# Altium PCB Load Cell ADC Module.PcbDoc
Units mm, origin at the board's own origin, x right, y up, seen from the top; angles counter-clockwise.
Board outline 30 x 27.5 mm, 4 copper layers (L1 - Primary, L2 - GND, L3 - GND, L4 - Secondary), stack 1.57 mm thick; 19 components, 15 nets, 60 pads, 33 vias.
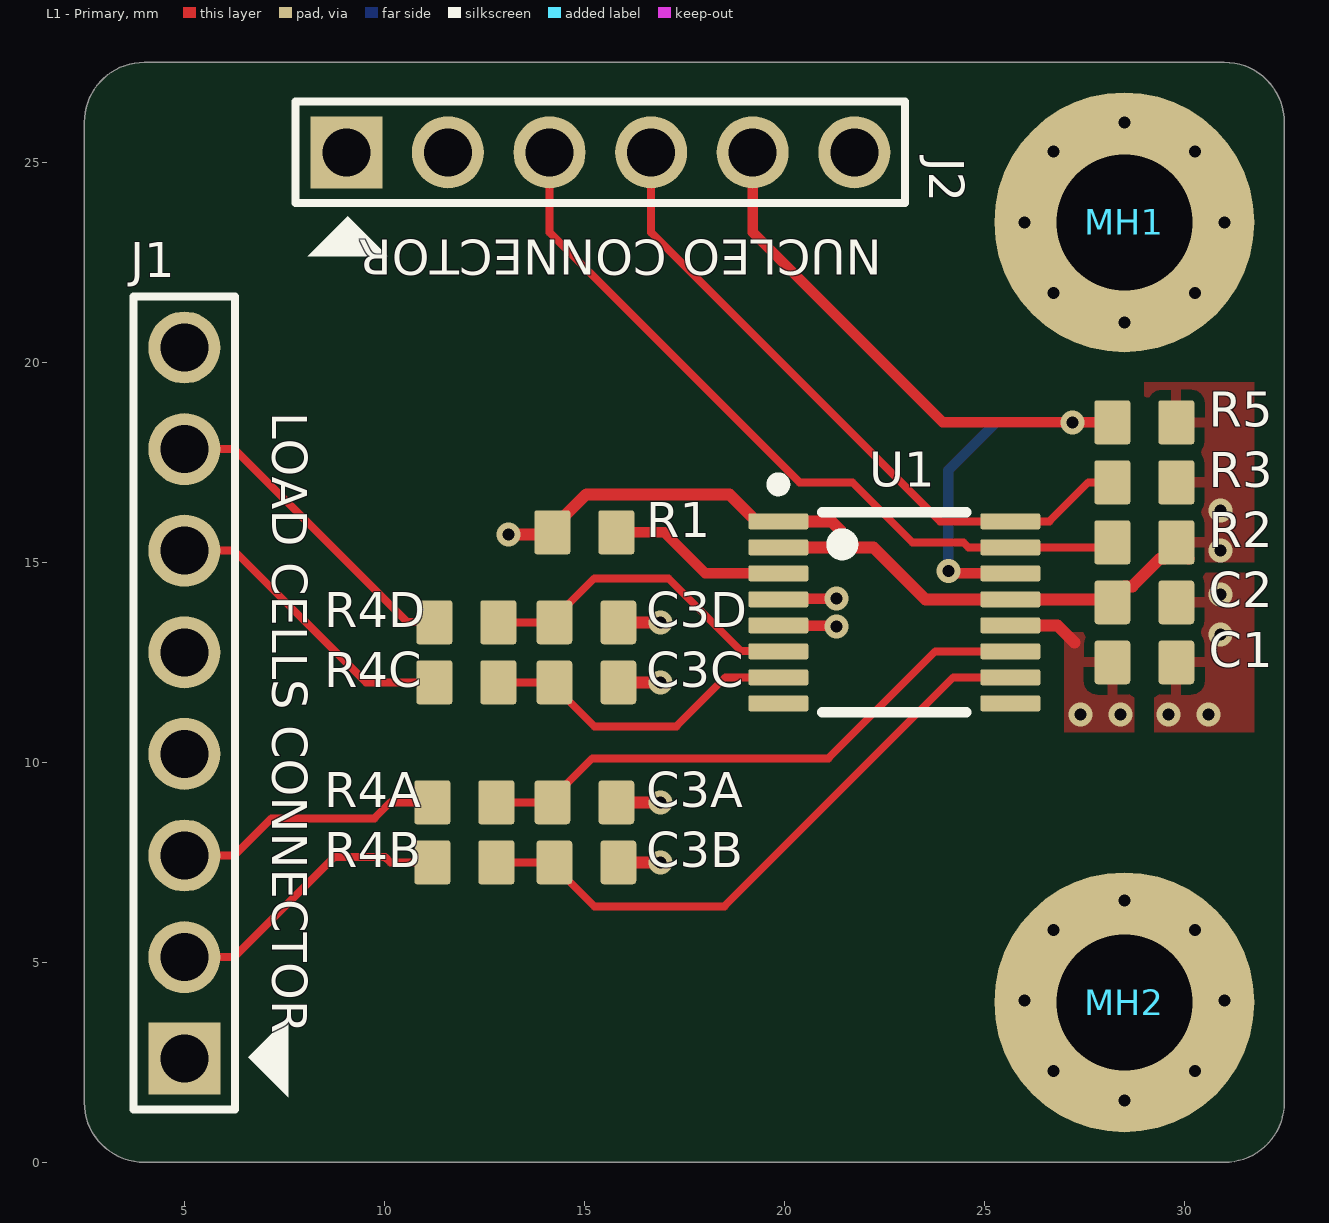
[diagram p0: L1 - Primary view]
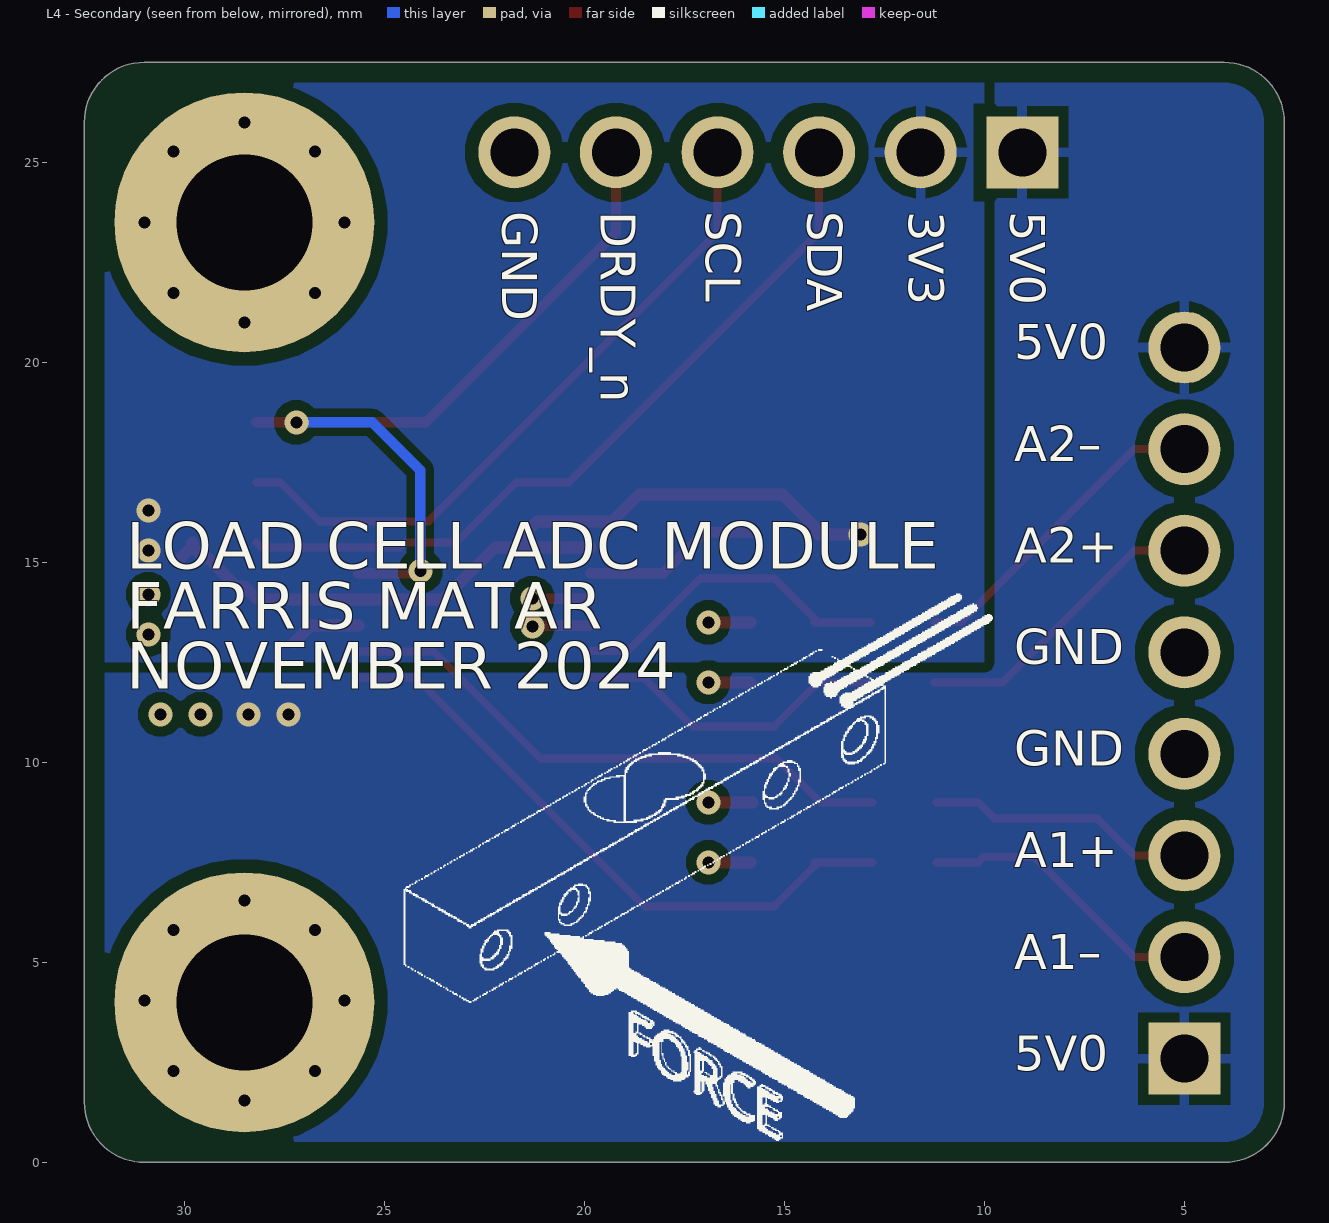
[diagram p1: L4 - Secondary view, seen from below]
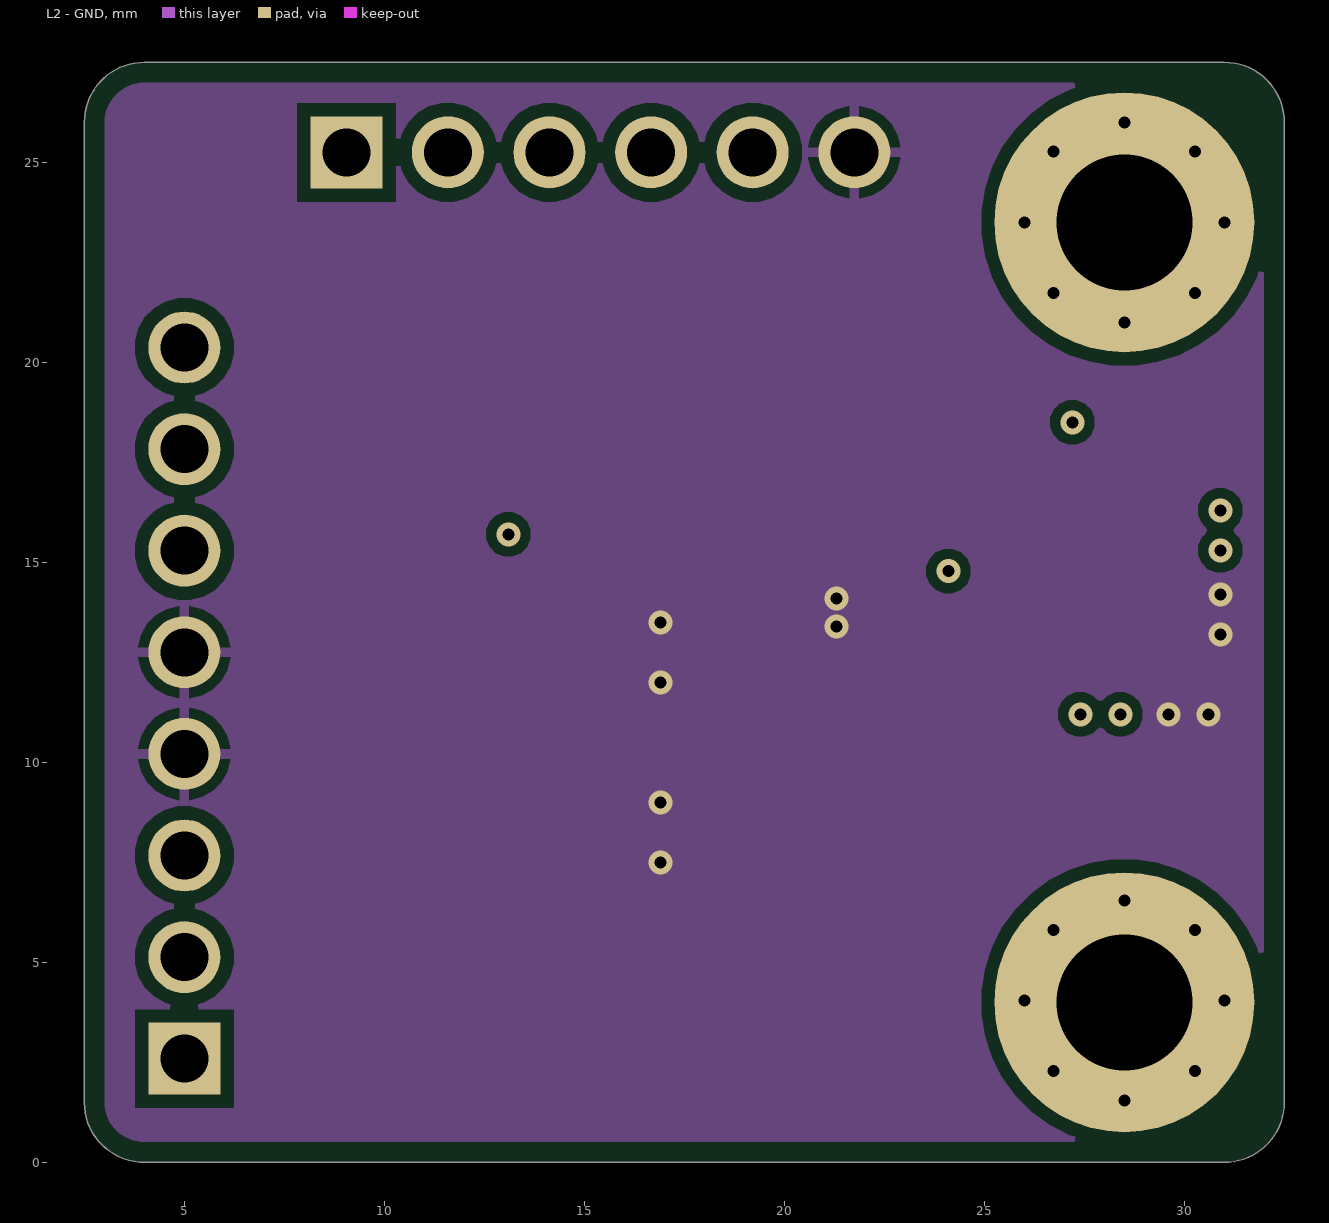
[diagram p2: L2 - GND]
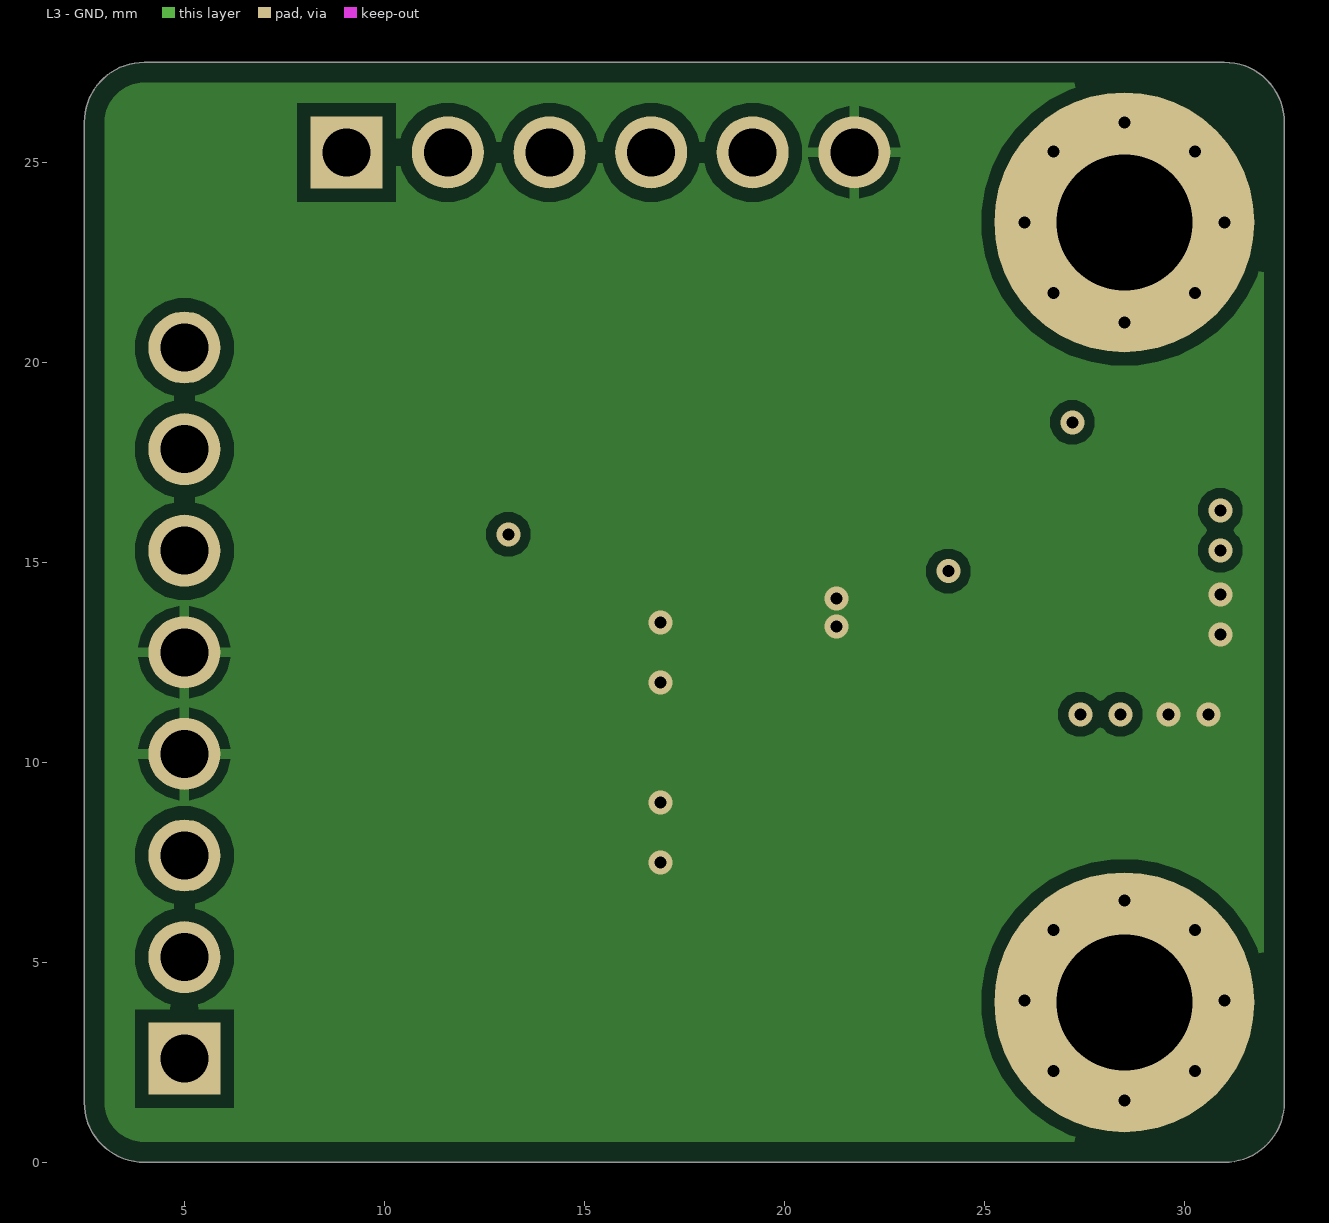
[diagram p3: L3 - GND]
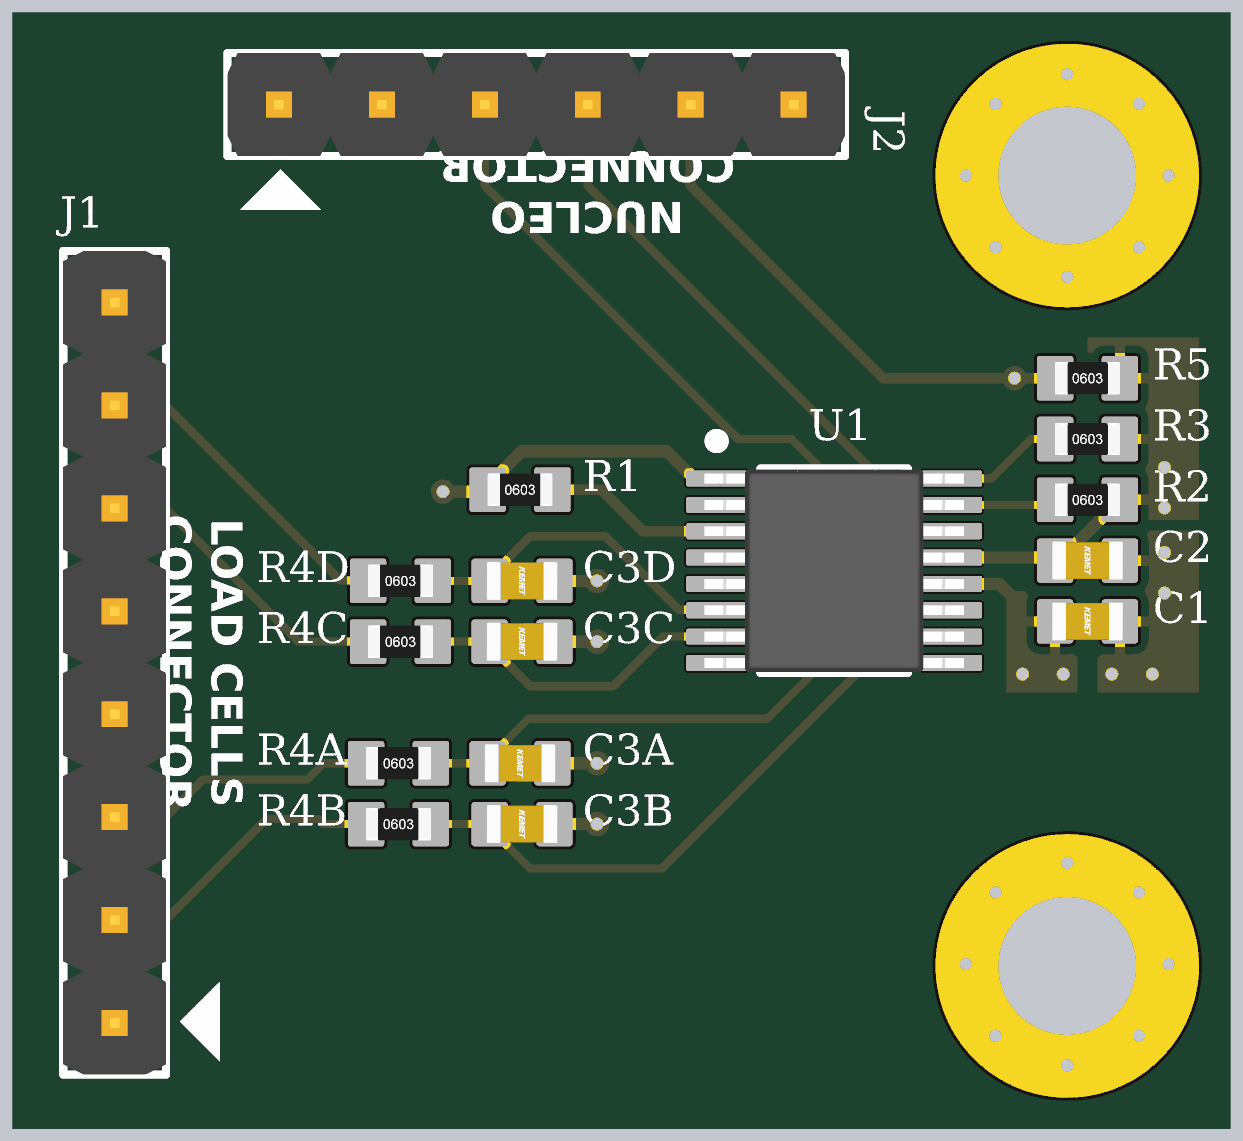
[diagram p4: 3D render of the assembled board from above, using the file's embedded part models]

## Layer stack, top to bottom
Top Solder: solder mask 0.0127, Solder Resist, Dk 3.8
L1 - Primary: signal copper 0.035
Dielectric 1: prepreg 0.2, 7628, Dk 4.6
L2 - GND: signal copper 0.0175
Core: core 1.065, FR-4, Dk 4.5
L3 - GND: signal copper 0.0175
Dielectric 2: prepreg 0.2, 7628, Dk 4.6
L4 - Secondary: signal copper 0.035
Bottom Solder: solder mask 0.0127, Solder Resist, Dk 3.8

## Board outline
2.5,1.5 ccw(c4,1.5) 4,0 31,0 ccw(c31,1.5) 32.5,1.5 32.5,26 ccw(c31,26) 31,27.5 4,27.5 ccw(c4,26) 2.5,26

## Design rules (kind name [scope] priority, off if disabled: settings)
BoardOutlineClearance [All] p1: gap=0.5 ignorepadtopadclearanceinfootprint=FALSE
Clearance ClearanceNetTie [HasFootprint('NET_TIE') vs HasFootprint('NET_TIE')] p1: gap=0 ignorepadtopadclearanceinfootprint=FALSE
Clearance ClearanceMidLayer1 [OnLayer('L2 - GND') Or IsVia Or IsThruPin vs OnLayer('L2 - GND')] p2: gap=0.2 ignorepadtopadclearanceinfootprint=FALSE except(0.25: SMDPad-Hole Fill-Hole Poly-Hole Region-Hole Text-Hole; 0.254: Arc-Via Arc-Hole Track-Via Track-Hole Via-Fill Via-Poly Via-Region Fill-Fill Fill-Poly Fill-Region Poly-Poly Poly-Region Region-Region; 0.33: Arc-THPad Track-THPad THPad-Fill THPad-Poly THPad-Region; 0.5: SMDPad-THPad THPad-THPad THPad-Via THPad-Hole Via-Via Via-Hole)
Clearance ClearanceMidLayer2 [OnLayer('L3 - GND') Or IsVia Or IsThruPin vs OnLayer('L3 - GND')] p3: gap=0.2 ignorepadtopadclearanceinfootprint=FALSE except(0.25: SMDPad-Hole Fill-Hole Poly-Hole Region-Hole Text-Hole; 0.254: Arc-Via Arc-Hole Track-Via Track-Hole Via-Fill Via-Poly Via-Region Fill-Fill Fill-Poly Fill-Region Poly-Poly Poly-Region Region-Region; 0.33: Arc-THPad Track-THPad THPad-Fill THPad-Poly THPad-Region; 0.5: SMDPad-THPad THPad-THPad THPad-Via THPad-Hole Via-Via Via-Hole)
Clearance ClearanceTopLayer [OnLayer('L1 - Primary') Or IsVia Or IsThruPin vs OnLayer('L1 - Primary') Or IsVia Or IsThruPin] p4: gap=0.2 ignorepadtopadclearanceinfootprint=FALSE except(0.25: SMDPad-Hole Fill-Hole Poly-Hole Region-Hole Text-Hole; 0.254: Arc-Via Arc-Hole Track-Via Track-Hole Via-Fill Via-Poly Via-Region Fill-Fill Fill-Poly Fill-Region Poly-Poly Poly-Region Region-Region; 0.33: Arc-THPad Track-THPad THPad-Fill THPad-Poly THPad-Region; 0.5: SMDPad-THPad THPad-THPad THPad-Via THPad-Hole Via-Via Via-Hole)
Clearance ClearanceBottomLayer [OnLayer('L4 - Secondary') Or IsVia Or IsThruPin vs OnLayer('L4 - Secondary') Or IsVia Or IsThruPin] p5: gap=0.2 ignorepadtopadclearanceinfootprint=FALSE except(0.25: SMDPad-Hole Fill-Hole Poly-Hole Region-Hole Text-Hole; 0.254: Arc-Via Arc-Hole Track-Via Track-Hole Via-Fill Via-Poly Via-Region Fill-Fill Fill-Poly Fill-Region Poly-Poly Poly-Region Region-Region; 0.33: Arc-THPad Track-THPad THPad-Fill THPad-Poly THPad-Region; 0.5: SMDPad-THPad THPad-THPad THPad-Via THPad-Hole Via-Via Via-Hole)
ComponentClearance [All] p1: gap=0.102 collisioncheckmode=3 verticalgap=0.102 showdistances=TRUE
DiffPairsRouting [All] p1: maxlimit=0.203 minlimit=0.102 mostfreqgap=0.203 toplayer_mingap=0.203 toplayer_minwidth=0.203 toplayer_maxwidth=1816.048 toplayer_prefwidth=0.203 midlayer1_maxgap=0.102 midlayer1_prefgap=0.102 midlayer1_minwidth=0.102 midlayer1_maxwidth=1816.048 midlayer1_prefwidth=0.102 midlayer2_maxgap=0.102 midlayer2_prefgap=0.102 midlayer2_minwidth=0.102 midlayer2_maxwidth=1816.048 midlayer2_prefwidth=0.102 bottomlayer_mingap=0.203 bottomlayer_minwidth=0.203 bottomlayer_maxwidth=1816.048 bottomlayer_prefwidth=0.203 maxuncoupledlength=12.7
Height [All] p1: minheight=0 maxheight=1816.048 prefheight=12.7
HoleSize [All] p1: absolutevalues=TRUE maxlimit=6.3 minlimit=0.2 maxpercent=80.000 minpercent=20.000
HoleToHoleClearance [All] p1: gap=0.25 allowstackedmicrovias=FALSE
MinimumAnnularRing [All] p1: minimumring=0.076
MinimumSolderMaskSliver [All] p1: minsoldermaskwidth=0.1
PolygonConnect PolygonConnect_1 [HasFootprint('TESTPOINT_CIRCLE_1MM') OR HasFootprint('TESTPOINT_SQUARE_1MM')] p1: connectstyle=Direct reliefconductorwidth=0.254 reliefentries=4 polygonreliefangle="90 Angle" airgapwidth=0.254
PolygonConnect [All] p2: thpad.connectstyle=Relief thpad.reliefconductorwidth=0.254 thpad.reliefentries=4 thpad.polygonreliefangle="90 Angle" thpad.airgapwidth=0.254 smdpad.connectstyle=Relief smdpad.reliefconductorwidth=0.254 smdpad.reliefentries=4 smdpad.polygonreliefangle="90 Angle" smdpad.airgapwidth=0.254 via.connectstyle=Direct via.reliefconductorwidth=0.254 via.reliefentries=4 via.polygonreliefangle="90 Angle" via.airgapwidth=0.254
RoutingVias [All] p1: holewidth=0.3 width=0.6 viastyle="Through Hole" minholewidth=0.2 minwidth=0.45 maxholewidth=6.3 maxwidth=6.55
ShortCircuit ShortCircuitNetTie [InNet('CELL_V0') vs InNet('VBAT-')] p1: allowed=TRUE
ShortCircuit [All] p2: allowed=FALSE
SilkToSilkClearance [All] p1: silktosilkclearance=0
SilkToSolderMaskClearance [IsPad] p1: minsilkscreentomaskgap=0.102 clearancetoexposedcopper=TRUE
SolderMaskExpansion [All] p1: expansion=0.075 istentingtop=FALSE
Width [All] p1: maxlimit=1816.048 minlimit=0.152 preferedwidth=0.254
21 further rules are at their usual default settings.

## Classes and differential pairs
channel class Filter: AIN0 AIN1 AIN2 AIN3
component class AIN3: C3D R4D
component class AIN2: C3C R4C
component class AIN1: C3B R4B
component class AIN0: C3A R4A
component class "ADC Module": C1 C2 J1 J2 MH1 MH2 R1 R2 R3 R5 U1

## Components (designator, comment, footprint, x,y, rotation, side; value= is the part's Value field where it differs from the comment)
C1 "CAP_0.1uF_16V_0603" CAP0603 29,12.5 r180 top value=0.1μF
C2 "CAP_0.1uF_16V_0603" CAP0603 29,14 r180 top value=0.1μF
C3A "CAP_0.068uF_16V_X7R_0603" CAP0603 15,9 r180 top (schematic designator C3)
C3B "CAP_0.068uF_16V_X7R_0603" CAP0603 15.05,7.5 r180 top (schematic designator C3)
C3C "CAP_0.068uF_16V_X7R_0603" CAP0603 15.05,12 r180 top (schematic designator C3)
C3D "CAP_0.068uF_16V_X7R_0603" CAP0603 15.05,13.5 r180 top (schematic designator C3)
J1 "HEADER 8x1" HDR1X8 5,11.48 r90 top
J2 "HEADER 6x1" HDR1X6 15.4,25.25 r0 top
MH1 "MOUNTING_HOLE_M3" MOUNTING_HOLE_3mm#1 28.5,23.5 r0 top
MH2 "MOUNTING_HOLE_M3" MOUNTING_HOLE_3mm#2 28.5,4.045 r0 top
R1 "RES_10kΩ_0603_1%" RES0603 15,15.75 r0 top value=10kΩ
R2 "RES_1.8kΩ_0603_1%" RES0603 29,15.5 r0 top value=1.8kΩ
R3 "RES_1.8kΩ_0603_1%" RES0603 29,17 r0 top value=1.8kΩ
R4A "RES_100Ω_0603_1%" RES0603 12,9 r0 top value=100Ω (schematic designator R4)
R4B "RES_100Ω_0603_1%" RES0603 12,7.5 r0 top value=100Ω (schematic designator R4)
R4C "RES_100Ω_0603_1%" RES0603 12.05,12 r0 top value=100Ω (schematic designator R4)
R4D "RES_100Ω_0603_1%" RES0603 12.05,13.5 r0 top value=100Ω (schematic designator R4)
R5 "RES_10kΩ_0603_1%" RES0603 29,18.5 r0 top value=10kΩ
U1 "ADS1219IPWR" TI_16-TSSOP 22.75,13.75 r0 top

## Footprints (in the part's own frame and the unit in brackets; to place one, negate y for a bottom-side part, rotate by r counter-clockwise, add the part's x,y. Pads: shape width x height; smd on the part's side, far side on the other; paste and mask are expansions set on the pad)
CAP0603 [mm]
  rrect20% 0.9x1.1 smd: 1(-0.8,0) 2(0.8,0)
  body extent -0.88,-0.48 0.87,0.47, height 0.87
HDR1X6 [mm] "Connector; Header; 6 Position"
  rect 1.8x1.8 hole 1.2: 1(-6.35,0)
  round 1.8 hole 1.2: 2(-3.81,0) 3(-1.27,0) 4(1.27,0) 5(3.81,0) 6(6.35,0)
  silkscreen extent -7.62,-2.6 7.62,1.27, body extent -7.62,-1.27 7.62,1.27, height 8.57
HDR1X8 [mm] "Connector; Header; 8 Position"
  rect 1.8x1.8 hole 1.2: 1(-8.89,0)
  round 1.8 hole 1.2: 2(-6.35,0) 3(-3.81,0) 4(-1.27,0) 5(1.27,0) 6(3.81,0) 7(6.35,0) 8(8.89,0)
  silkscreen extent -10.16,-2.6 10.16,1.27, body extent -10.16,-1.27 10.16,1.27, height 8.55
MOUNTING_HOLE_3mm#1 [mm] "3mm Hole"
  round 6.5 hole 3.4: 0(0,0)
MOUNTING_HOLE_3mm#2 [mm] "3mm Hole"
  round 6.5 hole 3.4: 0(0,-0.045)
RES0603 [mm] "Chip Resistor, Body 1.6x0.8mm, IPC Medium Density"
  rrect15% 0.9x1.1 smd: 1(-0.8,0) 2(0.8,0)
  body extent -0.8,-0.4 0.8,0.4, height 0.46
TI_16-TSSOP [mm]
  rrect25% 1.5x0.4 smd mask+0.05: 1(-2.9,2.275) 2(-2.9,1.625) 3(-2.9,0.975) 4(-2.9,0.325) 5(-2.9,-0.325) 6(-2.9,-0.975) 7(-2.9,-1.625) 8(-2.9,-2.275) 9(2.9,-2.275) 10(2.9,-1.625) 11(2.9,-0.975) 12(2.9,-0.325) 13(2.9,0.325) 14(2.9,0.975) 15(2.9,1.625) 16(2.9,2.275)
  silkscreen extent -3.05,-2.5 1.8,3.35, body extent -3.2,-2.5 3.2,2.5, height 1.13

## Part data
C1 C2: "CAP CER 0.1UF 16V X7R 0603", Dielectric=X7R, Manufacturer 1=Yageo, Manufacturer Part Number 1=CC0603KRX7R7BB104, Package=0603, Supplier Part Number 1=311-1088-1-ND, Voltage Rating=16V, Supplier 1=Digi-Key
C3A C3B C3C C3D: "CAP CER 0.068UF 16V X7R 0603", Capacitance=68nF, Manufacturer="KYOCERA AVX", Manufacturer Part Number=KGM15AR71C683KT, Package=0603, Rated DC Voltage (URdc)=16V, Supplier Part Number 1=478-KGM15AR71C683KTCT-ND, Temperature Characteristics Code=X7R, Mounting Type="Surface Mount", Supplier 1=Digikey
J1: "CONN HEADER VERT 8POS 2.54MM", Manufacturer 1="Würth Elektronik", Manufacturer Part Number 1=61300811121, Supplier Part Number 1=732-5321-ND, Mounting Type=TH, Pitch=2.54mm, Supplier 1=Digikey
J2: "CONN HEADER VERT 6POS 2.54MM", Manufacturer 1="Würth Elektronik", Manufacturer Part Number 1=61300611121, Supplier Part Number 1=732-5319-ND, Mounting Type=TH, Pitch=2.54mm, Supplier 1=Digi-Key
R1 R5: "RES 10K OHM 1% 1/8W 0603", Manufacturer 1="Stackpole Electronics Inc", Manufacturer Part Number 1=RNCP0603FTD10K0, Package=0603, Supplier Part Number 1=RNCP0603FTD10K0CT-ND, Mounting Type=SMD, Supplier 1=Digi-Key
R2 R3: "RES 1.8K OHM 1% 1/10W 0603", Manufacturer 1=Yageo, Manufacturer Part Number 1=RC0603FR-071K8L, Package=0603, Supplier Part Number 1=311-1.80KHRCT-ND, Supplier 1=Digikey
R4A R4B R4C R4D: "RES 100 OHM 1% 1/10W 0603", Manufacturer 1=Yageo, Manufacturer Part Number 1=RC0603FR-07100RL, Supplier Part Number 1=311-100HRCT-ND, Supplier 1=Digi-Key
U1: "IC ADC 24BIT SIGMA-DELTA 16TSSOP", Manufacturer 1="Texas Instruments", Supplier Part Number 1=296-50884-1-ND, Manufacturer Part Number 1=ADS1219IPWR, Supplier 1=Digikey

## Via types
v1: diameter 0.6, hole 0.3, L1 - Primary to L4 - Secondary, tented both sides, 33 vias

## Nets (pads, with @x,y where several pads share a name; then routed paths per layer and width w, separated by ;. In a path a pad name is that pad's centre, name@x,y a point inside that pad or via, vN(x,y) a via of type N, cw(c..) or ccw(c..) an arc to the next point about the centre after c; other vN are vias at no path point)
3V3: C2.2 J2.2 R1.1 R2.2 R3.2 R5.2 U1.1 U1.2 U1.13 | length 21
  L1 - Primary w0.3: v1(13.1,15.7) 14.15,15.7 R1.1 14.2,15.85 15.05,16.7 18.625,16.7 19.3,16.025 21.175,16.025 21.4,15.8 21.4,15.375 ; U1.2 21.4,15.375 ; C2.2@28.125,14.075 U1.13 23.525,14.075 22.225,15.375 21.4,15.375 ; C2.2@28.2,14.1 28.5,14.4 28.7,14.4 29.4,15.1 29.5,15.1 R2.2@29.8,15.4 ; R2.2 R2.2@29.8,15.4 ; R2.2@30.1,15.1 R2.2@29.8,15.4
  other v1: 30.9,15.3 30.9,16.3
5V0: C1.2 J1.1 J1.8 J2.1 U1.12 | length 1.8
  L1 - Primary w0.3: U1.12 26.825,13.425 27.25,13
  other v1: 27.4,11.2 28.4,11.2
A1+: J1.3 R4A.1 | length 6.8
  L1 - Primary w0.2: J1.3 6.25,7.67 7.18,8.6 9.75,8.6 10.15,9 R4A.1
A1-: J1.2 R4B.1 | length 7.3
  L1 - Primary w0.2: J1.2 6.25,5.13 8.75,7.63 10.02,7.63 10.15,7.5 R4B.1
A2+: J1.6 R4C.1 | length 7.6
  L1 - Primary w0.2: J1.6 6.25,15.29 9.54,12 R4C.1
A2-: J1.7 R4D.1 | length 8
  L1 - Primary w0.2: J1.7 6.25,17.83 10.568,13.512 11.238,13.512 R4D.1
AIN0: C3A.2 R4A.2 U1.11 | length 14.4
  L1 - Primary w0.2: R4A.2 14.1,9 15.2,10.1 21.1,10.1 23.775,12.775 U1.11
AIN1: C3B.2 R4B.2 U1.10 | length 15.7
  L1 - Primary w0.2: R4B.2 C3B.2 14.25,7.4 15.25,6.4 18.5,6.4 24.225,12.125 U1.10
AIN2: C3C.2 R4C.2 U1.7 | length 8
  L1 - Primary w0.2: R4C.2 C3C.2 14.25,11.9 15.25,10.9 17.3,10.9 18.525,12.125 U1.7
AIN3: C3D.2 R4D.2 U1.6 | length 8.3
  L1 - Primary w0.2: R4D.2 C3D.2 14.25,13.6 15.25,14.6 17.1,14.6 18.912,12.788 19.837,12.788 U1.6
DRDY_n: J2.5 R5.1 U1.14 | length 20.6
  L1 - Primary w0.254: J2.5 19.21,23.25 23.96,18.5 v1(27.2,18.5) R5.1 ; v1(24.1,14.779) 24.154,14.725 U1.14
  L4 - Secondary w0.254: v1(24.1,14.779) 24.1,17.3 25.3,18.5 v1(27.2,18.5)
GND: C1.1 C2.1 C3A.1 C3B.1 C3C.1 C3D.1 J1.4 J1.5 J2.6 U1.4 U1.5 | length 7.2
  L1 - Primary w0.254: U1.5 19.863,13.413 21.288,13.413 v1(21.3,13.4) ; U1.4 19.863,14.088 21.288,14.088 v1(21.3,14.1)
  L1 - Primary w0.3: C3A.1 v1(16.9,9) ; C3B.1 v1(16.9,7.5) ; C3C.1 v1(16.9,12) ; C3D.1 v1(16.9,13.5)
  other v1: 29.6,11.2 30.6,11.2 30.9,13.2 30.9,14.2
I2C_SCL: J2.4 R3.1 U1.16 | length 16.9
  L1 - Primary w0.2: J2.4 16.67,23.25 23.895,16.025 U1.16 26.625,16.025 27.6,17 R3.1
I2C_SDA: J2.3 R2.1 U1.15 | length 19.4
  L1 - Primary w0.2: J2.3 14.13,23.25 20.38,17 21.7,17 23.2,15.5 24.476,15.5 24.601,15.375 U1.15 28.075,15.375 R2.1
NetR1_2: R1.2 U1.3 | length 4.5
  L1 - Primary w0.254: R1.2 17,15.75 18.025,14.725 U1.3
pads on no net: MH1.0 MH2.0 U1.8 U1.9
copper on no net:
  other v1: 28.5,1.545 26.732,2.277 30.268,2.277 26,4.045 31,4.045 26.732,5.813 30.268,5.813 28.5,6.545 28.5,21 26.732,21.732 30.268,21.732 26,23.5 31,23.5 26.732,25.268 30.268,25.268 28.5,26

## Polygon pours and split planes (outlines as drawn)
5V0 on L1 - Primary "5V0_L01_P002" (solid, pour order 2): 28.75,10.75 28.75,13.25 27,13.25 27,10.75
GND on L1 - Primary "GND_L01_P001" (solid, pour order 1): 29.25,14.75 29.25,10.75 31.75,10.75 31.75,14.75
3V3 on L1 - Primary "3V3_L01_P000" (solid, pour order 0): 31.75,15 31.75,19.5 29,19.5 29,15
GND on L2 - GND "GND_L02_P003" (solid, remove dead copper, pour order 3): 0,1.5 ccw(c1.5,1.5) 1.5,0 33,0 ccw(c33,1.5) 34.5,1.5 34.5,26 ccw(c33,26) 33,27.5 1.5,27.5 ccw(c1.5,26) 0,26
GND on L3 - GND "GND_L03_P004" (solid, remove dead copper, pour order 4): 0,1.5 ccw(c1.5,1.5) 1.5,0 33,0 ccw(c33,1.5) 34.5,1.5 34.5,26 ccw(c33,26) 33,27.5 1.5,27.5 ccw(c1.5,26) 0,26
5V0 on L4 - Secondary "5V0_L04_P007" (solid, remove dead copper, pour order 7): 10,27.5 10,12.5 34.5,12.5 34.5,1.5 cw(c33,1.5) 33,0 1.5,0 cw(c1.5,1.5) 0,1.5 0,26 cw(c1.5,26) 1.5,27.5
3V3 on L4 - Secondary "3V3_L04_P006" (solid, remove dead copper, pour order 6): 10,12.5 34.5,12.5 34.5,26 ccw(c33,26) 33,27.5 10,27.5

## Silkscreen, mask and mechanical layers (free items; w line width, h text height)
Top Overlay:
  text "NUCLEO CONNECTOR" at 22.44,23.355 h1.5 r180
  text "LOAD CELLS CONNECTOR" at 6.913,18.75 h1.5 r270
Bottom Overlay:
  drawing of 430 lines, arcs and shapes, not listed
  text "5V0" at 9.636,23.773 h1.5 r90
  text "3V3" at 12.176,23.773 h1.5 r90
  text "SDA" at 14.716,23.773 h1.5 r90
  text "SCL" at 17.256,23.773 h1.5 r90
  text "DRDY_n" at 19.878,23.773 h1.5 r90
  text "GND" at 22.336,23.773 h1.5 r90
  text "5V0" at 9.25,19.784 h1.5
  text "A2–" at 9.25,17.244 h1.5
  text "A2+" at 9.25,14.704 h1.5
  text "LOAD CELL ADC MODULE" at 31.449,14.456 h2
  text "FARRIS MATAR" at 31.449,12.956 h2
  text "GND" at 9.25,12.164 h1.5
  text "NOVEMBER 2024" at 31.449,11.456 h2
  text "GND" at 9.25,9.624 h1.5
  text "A1+" at 9.25,7.084 h1.5
  text "A1–" at 9.25,4.544 h1.5
  text "5V0" at 9.25,2.004 h1.5
Mechanical 1:
  the board outline again, w0.254